# Altium PCB POC_PS.PcbDoc
Units mm, origin at the board's own origin, x right, y up, seen from the top; angles counter-clockwise.
Board outline 100 x 30 mm, 2 copper layers (Top Layer, Bottom Layer), stack 1.58 mm thick; 16 components, 8 nets, 36 pads, 0 vias.
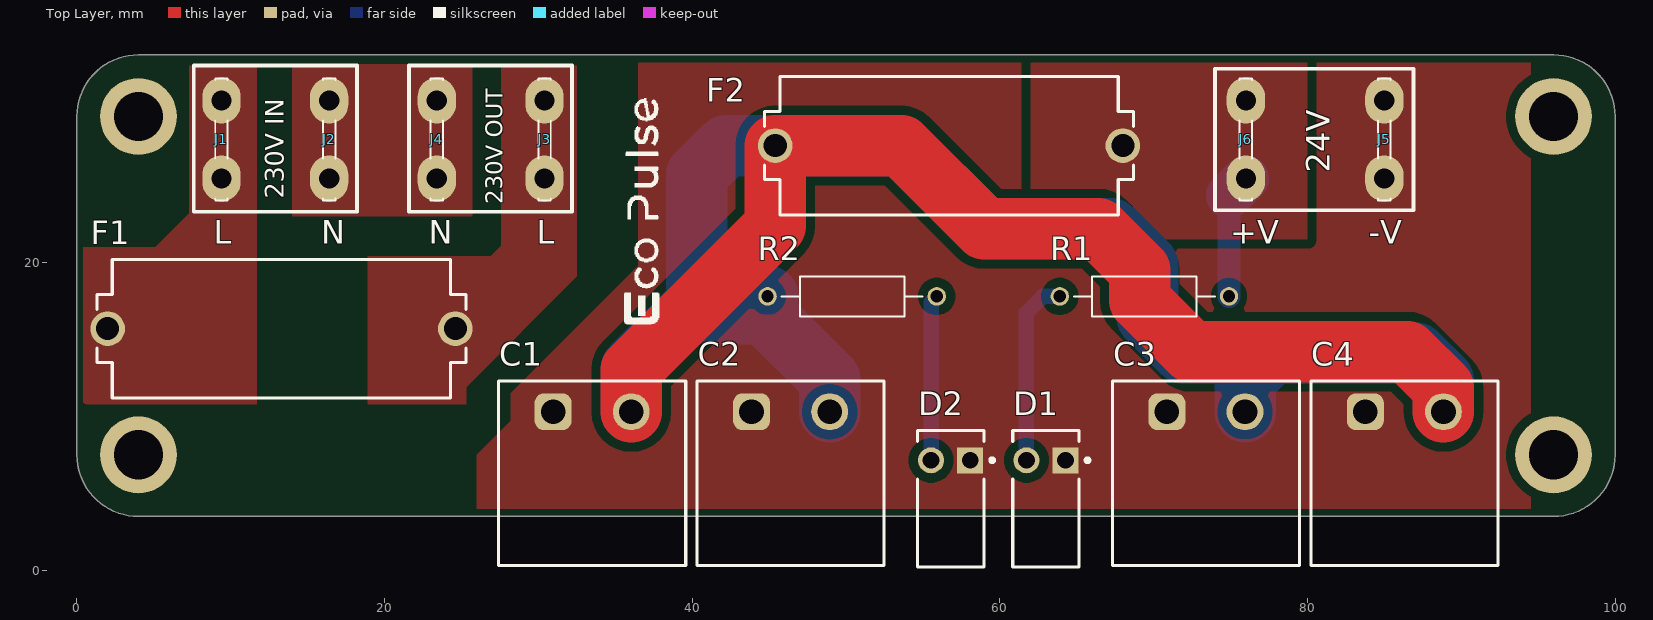
[diagram p0: Top Layer view]
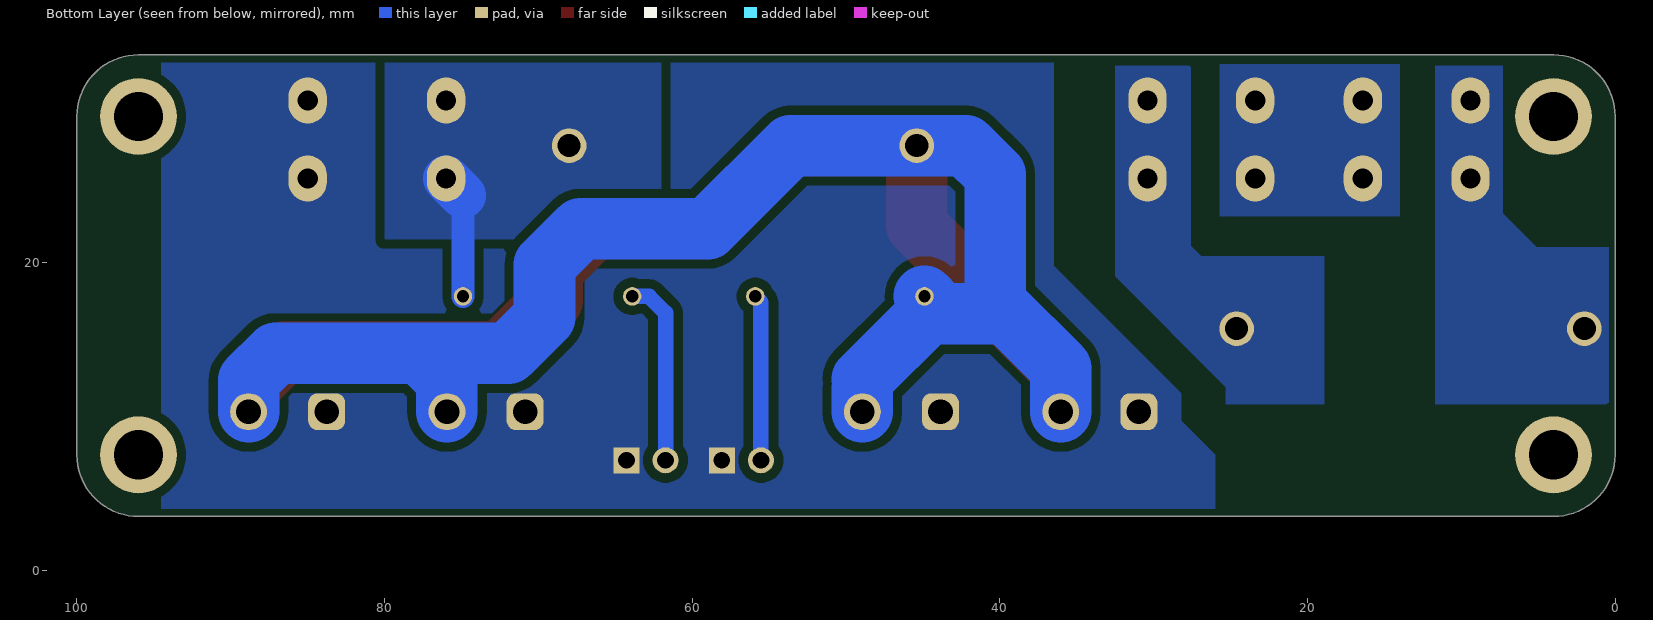
[diagram p1: Bottom Layer view, seen from below]

## Layer stack, top to bottom
Top Solder: solder mask 0.0102, Solder Resist, Dk 3.5
Top Layer: signal copper 0.0356
Dielectric 1: dielectric 1.5086, FR-4, Dk 4.8
Bottom Layer: signal copper 0.0356
Bottom Solder: solder mask 0.0102, Solder Resist, Dk 3.5

## Board outline
0,7.5 0,29.5 cw(c4,29.5) 4,33.5 96,33.5 cw(c96,29.5) 100,29.5 100,7.5 cw(c96,7.5) 96,3.5 4,3.5 cw(c4,7.5)

## Design rules (kind name [scope] priority, off if disabled: settings)
Clearance [All] p1: gap=0.6 ignorepadtopadclearanceinfootprint=FALSE
PolygonConnect [All] p1: connectstyle=Direct reliefconductorwidth=0.254 reliefentries=4 polygonreliefangle="90 Angle" airgapwidth=0.254
RoutingVias [All] p1: holewidth=0.711 width=1.27 viastyle="Through Hole" minholewidth=0.711 minwidth=1.27 maxholewidth=0.711 maxwidth=1.27
SolderMaskExpansion [All] p1: expansion=0.102 istentingtop=FALSE
SupplyNets "Schematic Supply Nets" [InNet('GND')] p1: voltage=0.000
Width [All] p1: maxlimit=10 minlimit=0.254 preferedwidth=3 minimp=50.000000 maximp=50.000000 favimp=50.000000
30 further rules are at their usual default settings.

## Classes and differential pairs
component class Sheet3: C1 C3 C4 D1 D2 F1 F2 J1 J2 J3 J4 J5 J6 R1 R2

## Components (designator, comment, footprint, x,y, rotation, side; value= is the part's Value field where it differs from the comment)
C1 "691313510002" 691313510002 33.5,6.3 r0 top
C2 "691313510002" 691313510002 46.4,6.3 r0 top
C3 "691313510002" 691313510002 73.4,6.3 r0 top
C4 "691313510002" 691313510002 86.3,6.3 r0 top
D1 "551-0207F" FP-551-0207F-MFG 63,4.65 r0 top
D2 "551-0207F" FP-551-0207F-MFG 56.8,4.65 r0 top
F1 "696101000002" 696101000002 1283.3,1285.7 r0 top
F2 "696101000002" 696101000002 -1213.3,-1242.4 r180 top
J1 "L" KEYSTONE_1287 9.4,28 r270 top
J2 "N" KEYSTONE_1287 16.4,28 r270 top
J3 "L" KEYSTONE_1287 30.4,28 r270 top
J4 "N" KEYSTONE_1287 23.4,28 r90 top
J5 "-V" KEYSTONE_1287 85,28 r90 top
J6 "+V" KEYSTONE_1287 76,28 r90 top
R1 "MFR-25FBF52-1K" RESAD1100W55L680D260 69.4,17.8 r0 top
R2 "MFR-25FBF52-1K" RESAD1100W55L680D260 50.4,17.8 r180 top

## Footprints (in the part's own frame and the unit in brackets; to place one, negate y for a bottom-side part, rotate by r counter-clockwise, add the part's x,y. Pads: shape width x height; smd on the part's side, far side on the other; paste and mask are expansions set on the pad)
691313510002 [mm] "5,08mm - PCB Headers - Horizontal - Closed ends - 02p"
  rrect50% 2.4x2.4 hole 1.6: 1(-2.54,4)
  round 2.4 hole 1.6: 2(2.54,4)
  silkscreen extent -6.08,-6 6.08,6, body extent -6.08,-6 6.08,6, height 8.55
696101000002 [mm] "FUSEHOLDER BLOCKS - PCB - CLIP COVER - THT"
  round 2.25 hole 1.5: 1(-1281.3,-1270) 2(-1258.7,-1270)
  silkscreen extent -1282,-1274.5 -1258,-1265.5, body extent -1282,-1274.5 -1258,-1265.5, height 13.55
FP-551-0207F-MFG [mm]
  rect 1.69x1.69 hole 1.09 paste-2539.97 mask+0: 1(1.27,2.495)
  round 1.69 hole 1.09 paste-2539.97 mask+0: 2(-1.27,2.495)
  silkscreen extent -2.16,-4.44 2.83,4.44, body extent -2.26,-4.54 2.26,4.54, height 0.25
KEYSTONE_1287 [mm]
  oval 3x2.5 hole 1.32: 1_1(-2.54,0) 1_2(2.54,0)
  silkscreen extent -3.96,-0.41 3.96,0.41, body extent -3.96,-0.81 3.96,0, height 14.02
RESAD1100W55L680D260 [mm]
  round 1.2 hole 0.8: 1(-5.5,0) 2(5.5,0)
  silkscreen extent -4.58,-1.3 4.58,1.3, body extent -5.77,-1.2 5.77,1.2, height 2.4

## Part data
C1 C2 C3 C4: library part CMP-1502-02192-3, "313; 5.08MM Pitch Straight Pluggable Term Block, Pcb Header, Through Hole, 2 Way", Color=Green, Current=20A, Max Operating Temperature=105°C, Min Operating Temperature=-40°C, Voltage=300V, Contact Material=Tin, Contact Plating=Tin, Current Rating=20A, Gender=Male, Height=8.7mm, Lead Pitch=5.08mm, Length=11.5mm, Mount="Through Hole", Number of Contacts=2, Number of Levels=1, Number of Pins=2, Number of Positions Per Level=2, Number of Rows=1, Packaging=Box, Pitch=5.08mm, RoHS=Compliant, Termination=Solder, Voltage Rating=300V, Width=12.16mm
D1 D2: library part CMP-15384-000011-1, "LED 3MM HIGH EFF GREEN", Color=Green, Current=10mA, Forward Voltage=2.1V, Max Operating Temperature=85°C, Min Operating Temperature=-25°C, Package Quantity=100, Power Dissipation=75mW, Reverse Voltage=3V, Depth=8.89mm, Dominant Wavelength=563nm, Element Configuration=Single, Forward Current=10mA, Height=7.11mm, Illumination Color=Green, Lead Free="Lead Free", Length=4.32mm, Lens Color=Green, Lens Size=5mm, Lens Style=Diffused, Luminous Intensity=16mcd, Mount="Through Hole", Number of Elements=1, Number of LEDs=1, Number of Pins=2, Operating Supply Voltage=2.1V, Orientation="Right Angle", Packaging=Bulk, Radiation Hardening=No, REACH SVHC="No SVHC", RoHS Compliant=Yes, Series=551, Test Current=10mA, Viewing Angle=45°, Voltage Rating=2.1V, Wavelength=563nm, Width=4.32mm
F1 F2: library part CMP-1502-00233-4, "WR-FSH Fuse Holder Blocks Fuse Holder Blocks Clip Cover for PCB", Fuse Current=10A, Max Operating Temperature=120°C, Min Operating Temperature=-30°C, Voltage Rating (AC)=250V, Height=13.6mm, Mount="Through Hole", Packaging=Box, REACH SVHC=Unknown, RoHS=Compliant
J1 J2 J3 J4 J5 J6: library part 1287, "Male .250 Quick Fit Terminal", Package=None, Check_prices=https://www.snapeda.com/parts/1287/Keystone/view-part/?ref=eda, MF="Keystone Electronics Corp.", MP=1287, SnapEDA_Link=https://www.snapeda.com/parts/1287/Keystone/view-part/?ref=snap
R1 R2: "1.07 kOhms Â±1% 0.25W, 1/4W Through Hole Resistor Axial - Metal Film", Package="RADIAL-2 YAGEO", Check_prices=https://www.snapeda.com/parts/MFR-25FBF52-1K/Yageo/view-part/?ref=eda, MF=Yageo, MP=MFR-25FBF52-1K, SnapEDA_Link=https://www.snapeda.com/parts/MFR-25FBF52-1K/Yageo/view-part/?ref=snap

## Free pads (board coordinates)
  round 5 hole 3.2: 2(4,7.5) 2(4,29.5) 2(96,7.5) 2(96,29.5)

## Nets (pads, with @x,y where several pads share a name; then routed paths per layer and width w, separated by ;. In a path a pad name is that pad's centre, name@x,y a point inside that pad or via, vN(x,y) a via of type N, cw(c..) or ccw(c..) an arc to the next point about the centre after c; other vN are vias at no path point)
GND: C1.1 C2.1 C3.1 C4.1 D1.1 D2.1 J5.1_1 J5.1_2
NetC1_2: C1.2 C2.2 C3.2 C4.2 F2.2 R2.2 | length 168
  Top Layer w4: C1.2 36.04,13.04 45.4,22.4 F2.2 53.6,27.6 59,22.2 66.4,22.2 69.1,19.5 69.1,17.543 72.443,14.2 86.497,14.2 88.84,11.857 C4.2
  Bottom Layer w4: C1.2 36.04,13.14 39.9,17 ; 44.685,16.657 48.94,12.403 ; R2.2 44.221,17.121 43.757,16.657 40.3,16.657 40.3,17 40.3,25.7 42.2,27.6 F2.2 53.6,27.6 59,22.2 67.257,22.2 69.6,19.857 69.6,16.443 71.943,14.1 77.697,14.1 ; C2.2 48.94,11.84 ; C3.2 75.94,12.343 77.697,14.1 ; C4.2 88.84,12.343 87.083,14.1 77.697,14.1
NetD1_2: D1.2 R1.1 | length 12.2
  Bottom Layer w1: D1.2 61.73,16.73 62.8,17.8 R1.1
NetD2_2: D2.2 R2.1 | length 10.8
  Bottom Layer w1: D2.2 55.53,17.43 R2.1
NetF1_1: F1.1 J1.1_1 J1.1_2
NetF1_2: F1.2 J3.1_1 J3.1_2
NetF2_1: F2.1 J6.1_1 J6.1_2 R1.2 | length 8.1
  Bottom Layer w1.5: R1.2 74.9,24.36
  Bottom Layer w3: 74.9,24.36 J6.1_1
NetJ2_1_1: J2.1_1 J2.1_2 J4.1_1 J4.1_2

## Polygon pours and split planes (outlines as drawn)
GND on Top Layer "GND_L01_P017" (solid, pour order 17): 36.5,33 94.5,33 94.5,4 26,4 26,7.5 28.2,9.7 28.2,11.5 36.5,19.8
NetF2_1 on Top Layer "NETF2_1_L01_P016" (solid, pour order 16): 62,33 80,33 80,21.5 62,21.5
NetF1_2 on Top Layer "NETF1_2_L01_P002" (solid, pour order 2): 32.5,32.8 27.7,32.8 27.6,32.7 27.6,21.1 26.9,20.4 18.9,20.4 18.9,10.8 25.3,10.8 25.3,11.9 32.5,19.1
NetF1_1 on Top Layer "NETF1_1_L01_P001" (solid, pour order 1): 11.7,32.8 7.3,32.8 7.3,23.2 5.1,21 0.4,21 0.4,10.6 0.6,10.8 11.7,10.8
NetJ2_1_1 on Top Layer "NETJ2_1_1_L01_P000" (solid, pour order 0): 14,32.9 25.7,32.9 25.7,23 14,23
GND on Bottom Layer "GND_L02_P021" (solid, pour order 21): 36.5,33 94.5,33 94.5,4 26,4 26,7.5 28.2,9.7 28.2,11.5 36.5,19.8
NetF2_1 on Bottom Layer "NETF2_1_L02_P020" (solid, pour order 20): 62,33 80,33 80,21.5 62,21.5
NetF1_2 on Bottom Layer "NETF1_2_L02_P014" (solid, pour order 14): 32.5,32.8 27.7,32.8 27.6,32.7 27.6,21.1 26.9,20.4 18.9,20.4 18.9,10.8 25.3,10.8 25.3,11.9 32.5,19.1
NetJ2_1_1 on Bottom Layer "NETJ2_1_1_L02_P012" (solid, pour order 12): 14,32.9 25.7,32.9 25.7,23 14,23
NetF1_1 on Bottom Layer "NETF1_1_L02_P013" (solid, pour order 13): 11.7,32.8 7.3,32.8 7.3,23.2 5.1,21 0.4,21 0.4,10.6 0.6,10.8 11.7,10.8

## Silkscreen, mask and mechanical layers (free items; w line width, h text height)
Top Overlay:
  drawing of 21 lines, arcs and shapes, not listed
  text "24V" at 81.446,25.854 h1.52 r90
  text "230V IN" at 13.446,24.154 h1.2 r90
  text "230V OUT" at 27.7,23.8 h1.1 r90
Mechanical 1:
  the board outline again, w0.254